# Altium PCB PCB1.PcbDoc
Units mil, origin at the board's own origin, x right, y up, seen from the top; angles counter-clockwise.
Board outline 6000 x 4000 mil, 2 copper layers (Top Layer, Bottom Layer); 43 components, 47 nets, 201 pads, 1 vias.
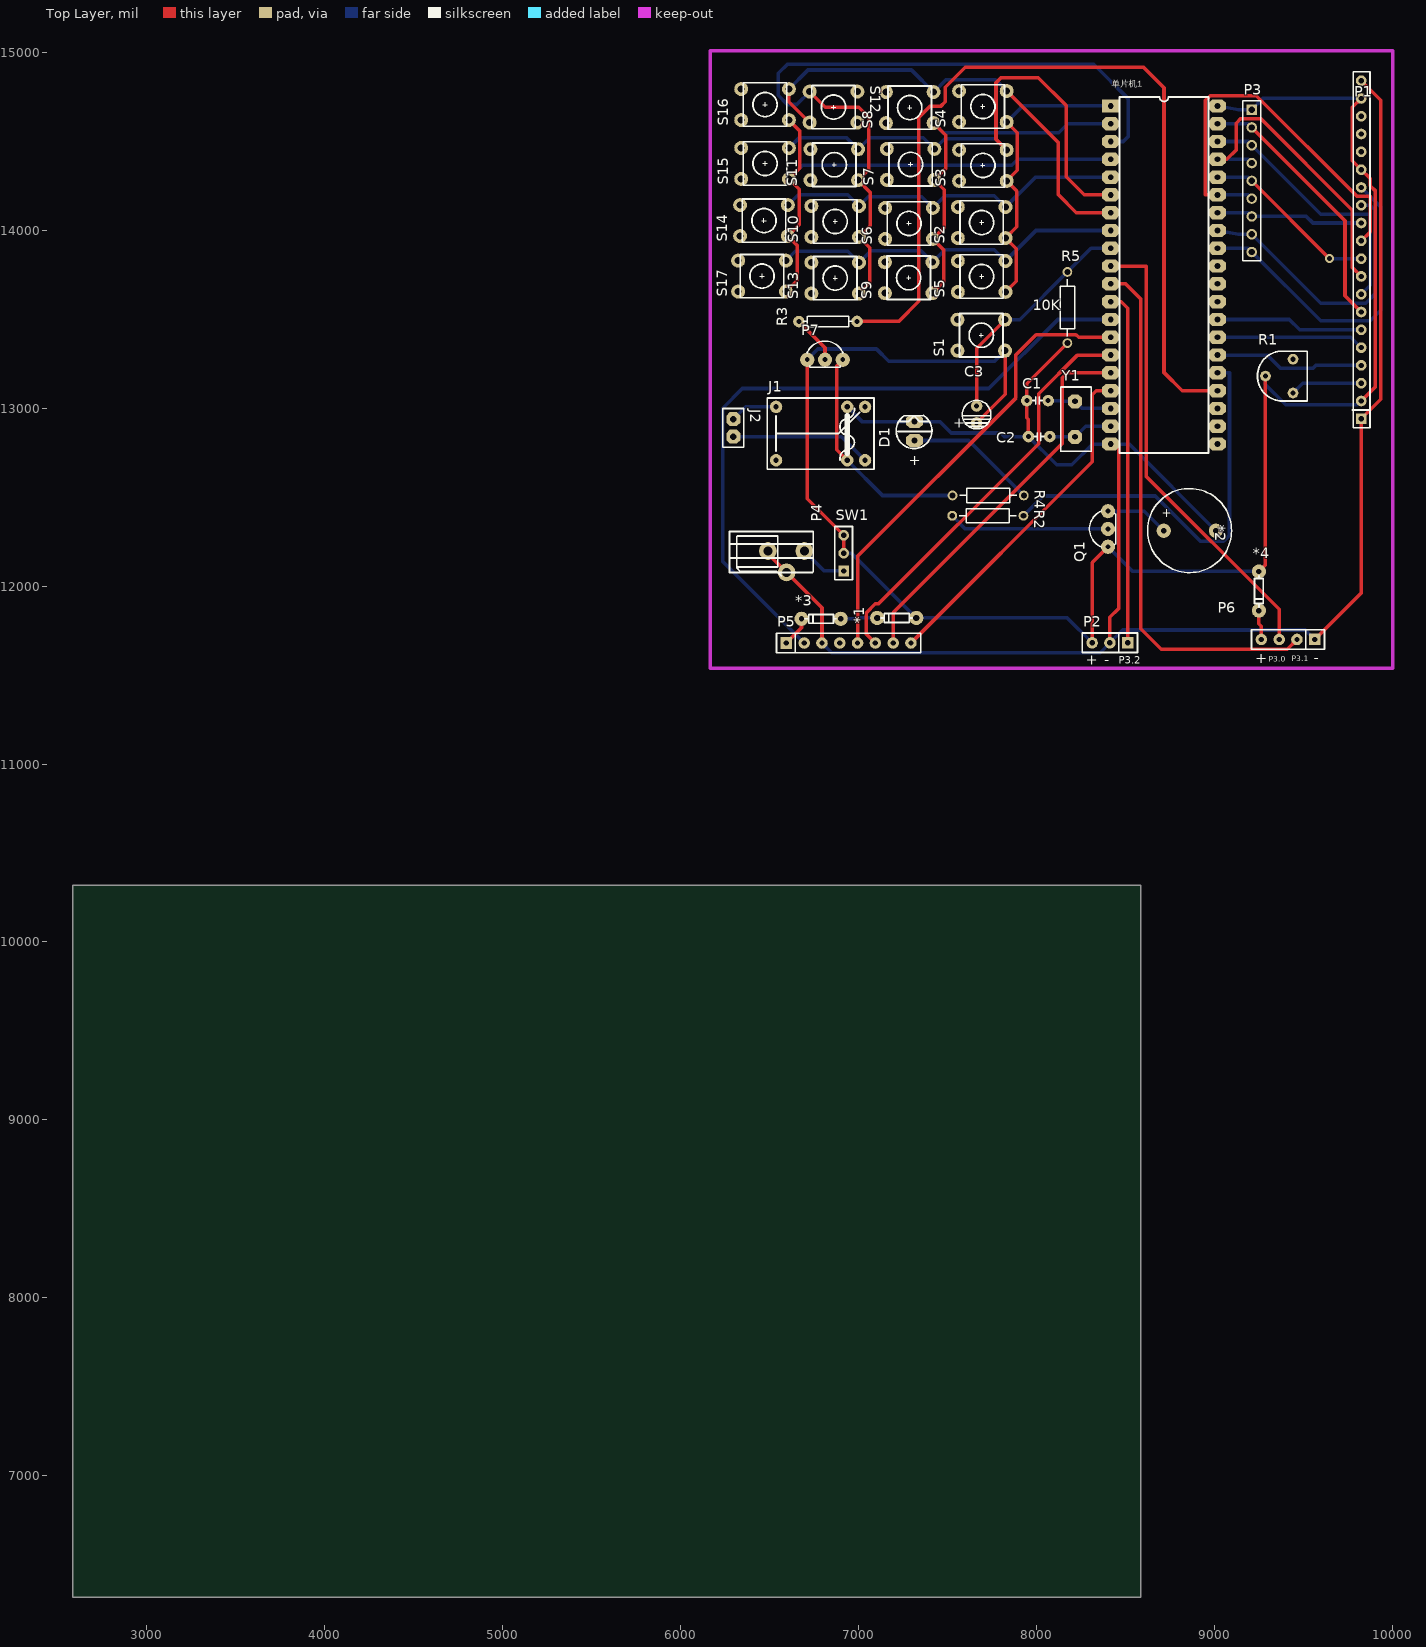
[diagram p0: Top Layer view]
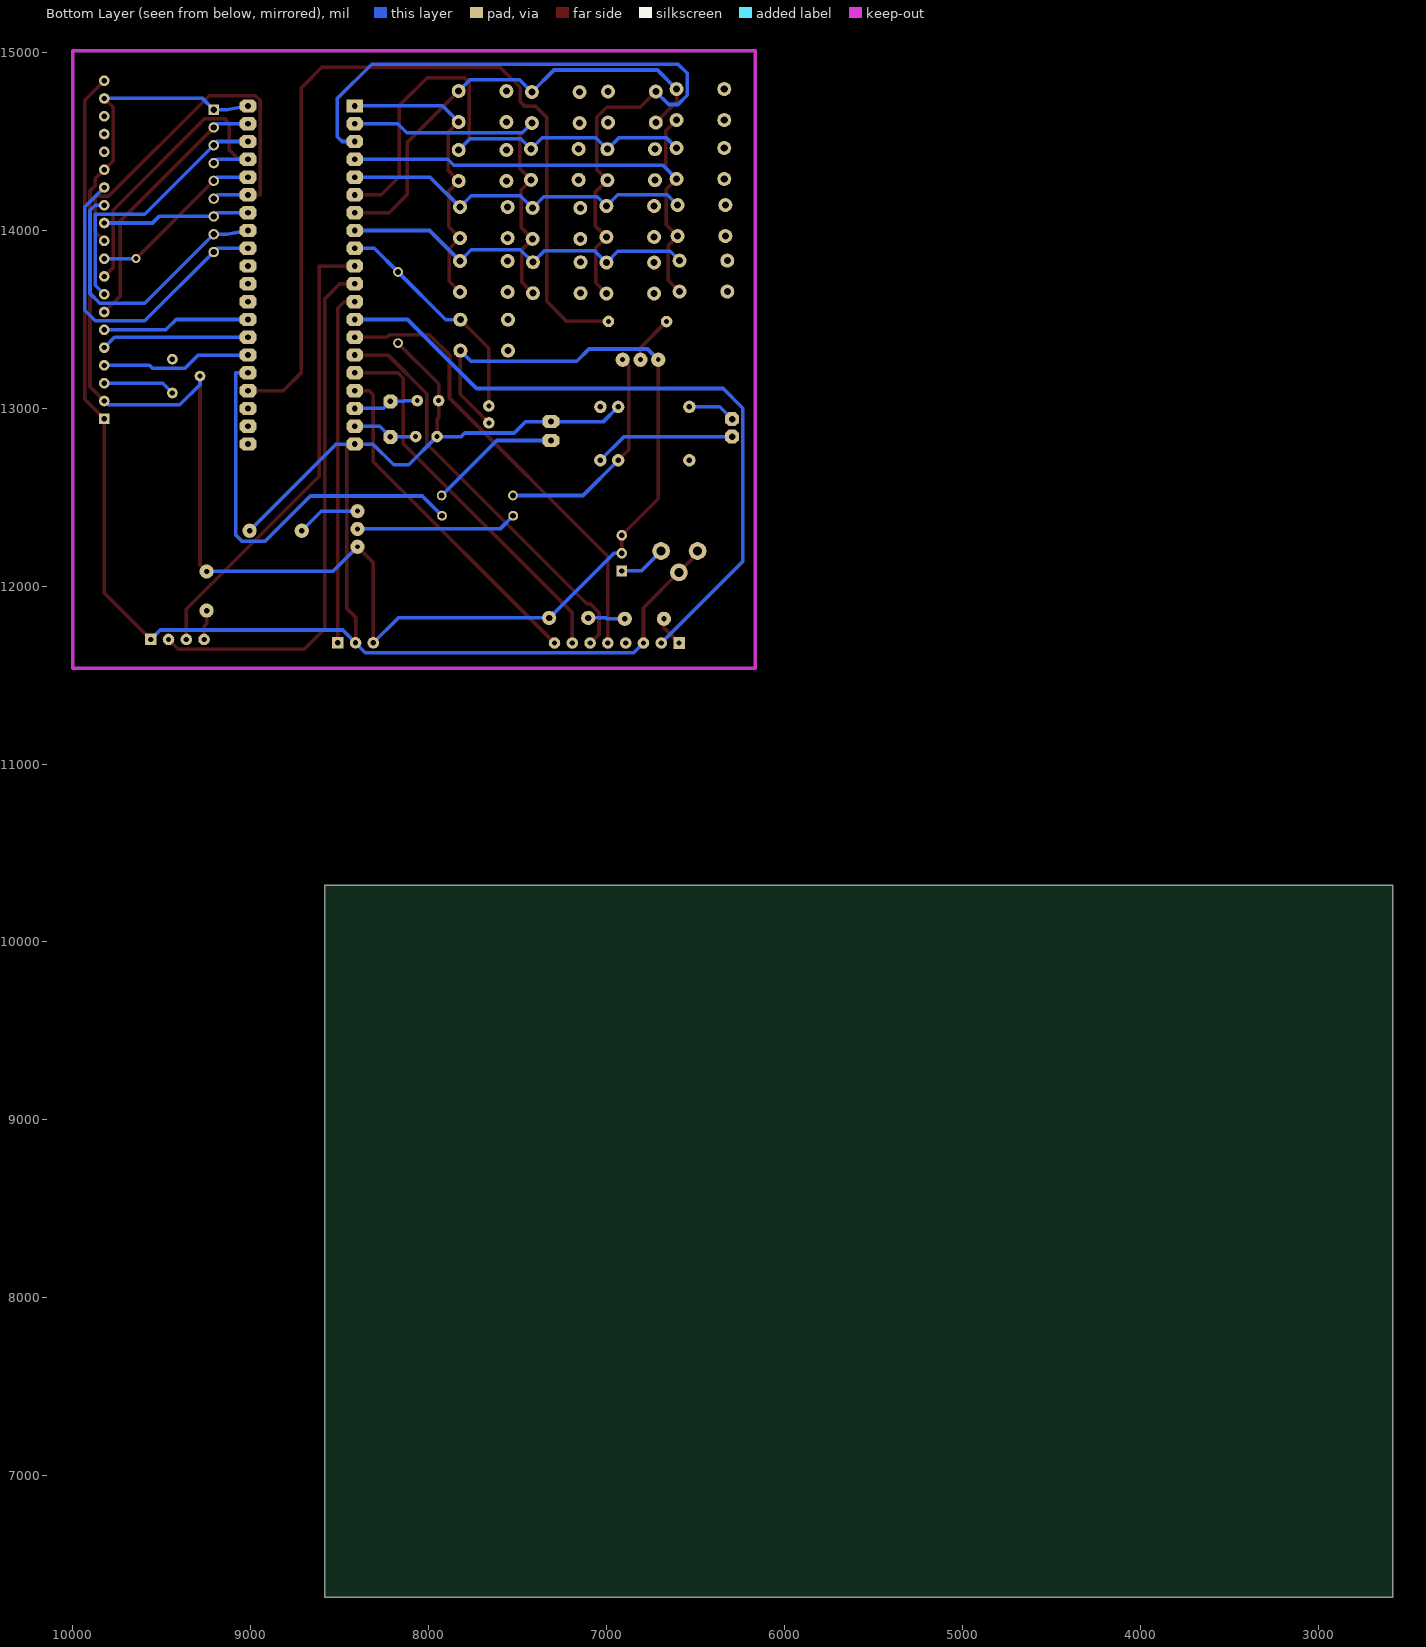
[diagram p1: Bottom Layer view, seen from below]

## Layer stack, top to bottom
Top Layer: signal copper 1.4
Dielectric: dielectric 12.6, FR-4, Dk 4.8
Bottom Layer: signal copper 1.4

## Board outline
2584,6318 8584,6318 8584,10318 2584,10318

## Design rules (kind name [scope] priority, off if disabled: settings)
Clearance [All] p1: gap=10
PolygonConnect [All] p1: connectstyle=Relief reliefconductorwidth=10 reliefentries=4 polygonreliefangle="90 Angle"
RoomDefinition Sheet3 [InComponentClass('Sheet3')] p1: confinementstyle=ConfineIn formatcopy=TRUE lockcomponents=FALSE outline 5866,10857 11370,10857 11370,15409 5866,15409
RoutingVias [All] p1: holewidth=28 width=50 viastyle="Through Hole" minholewidth=28 minwidth=50 maxholewidth=28 maxwidth=50
SilkscreenOverComponentPads [All] p1: minsilkscreentomaskgap=10
SolderMaskExpansion [All] p1: expansion=4
Width [All] p1: maxlimit=20 minlimit=20 preferedwidth=20
27 further rules are at their usual default settings.

## Components (designator, comment, footprint, x,y, rotation, side; value= is the part's Value field where it differs from the comment)
*1 "DIODE_1N4148" 1N4148#1 7321,11821 r180 top
*2 "蜂鸣器" 蜂鸣器 8714,12311 r0 top
*3 "DIODE_1N4148" 1N4148#2 6896,11816 r180 top
*4 "DIODE_1N4148" 1N4148#2 9249,12079 r270 top
C1 "30P" CAP_1 8065,13042 r180 top
C2 "30P" CAP_1 7954,12840 r0 top
C3 "10UF" CAP_2 7663,12917 r90 top
D1 "LED" LED 7314,12818 r90 top
J1 "继电器" JDQ 6771,12832 r90 top
J2 "CON2" SIP2 6296,12938 r270 top
P1 "12864" 12864 9829,13865 r90 top
P2 "PIN3" PIN3 8512,11681 r180 top
P3 "排阻" HDR1X9 9209,14677 r270 top
P4 "POWER_3.5" POWER_3.5 6690,12197 r180 top
P5 "RFID" RFID 6919,11670 r0 top
P6 "PIN4" PIN4 9563,11700 r180 top
P7 "8550" PNP 6716,13272 r0 top
Q1 "8550" PNP 8401,12226 r90 top
R1 "电位器" 电位器 9441,13085 r0 top
R2 "Res2" AXIAL-0.4 7726,12395 r0 top
R3 "RES" RES 6991,13487 r180 top
R4 "Res2" AXIAL-0.4 7728,12509 r0 top
R5 "Res2" AXIAL-0.4 8173,13565 r90 top
S1 "SW-PB" 6X6X? 7689,13410 r90 top
S2 "SW-PB" 6X6X? 7691,14043 r90 top
S3 "SW-PB" 6X6X? 7698,14364 r90 top
S4 "SW-PB" 6X6X? 7698,14695 r90 top
S5 "SW-PB" 6X6X? 7691,13740 r90 top
S6 "SW-PB" 6X6X? 7283,14038 r90 top
S7 "SW-PB" 6X6X? 7292,14370 r90 top
S8 "SW-PB" 6X6X? 7287,14689 r90 top
S9 "SW-PB" 6X6X? 7281,13733 r90 top
S10 "SW-PB" 6X6X? 6868,14049 r90 top
S11 "SW-PB" 6X6X? 6863,14368 r90 top
S12 "SW-PB" 6X6X? 6859,14691 r270 top
S13 "SW-PB" 6X6X? 6868,13731 r90 top
S14 "SW-PB" 6X6X? 6468,14054 r90 top
S15 "SW-PB" 6X6X? 6474,14375 r90 top
S16 "SW-PB" 6X6X? 6474,14706 r90 top
S17 "SW-PB" 6X6X? 6457,13742 r90 top (schematic designator S1)
SW1 "开关_2" 开关_2 6916,12085 r90 top
Y1 "11.0592MHz" 晶振 8216,12838 r90 top
单片机1 "AT89S52" DIP40C 8416,14698 r0 top

## Footprints (in the part's own frame and the unit in brackets; to place one, negate y for a bottom-side part, rotate by r counter-clockwise, add the part's x,y. Pads: shape width x height; smd on the part's side, far side on the other; paste and mask are expansions set on the pad)
1N4148#1 [mil]
  round 80 hole 35: A(-3.11,0) K(216.89,0)
  silkscreen extent 22,-25 197,25
1N4148#2 [mil]
  round 80 hole 30: A(-3.11,0) K(216.89,0)
  silkscreen extent 22,-25 197,25
6X6X? [mm]
  round 2 hole 1: 1(-2.22,-3.407) 2(2.2,-3.407) 3(2.2,3.4) 4(-2.22,3.4)
  silkscreen extent -3.11,-3.1 3.09,3.1
12864 [mil]
  rect 60x60 hole 29.68: 1(-925,5)
  round 60 hole 29.68: 2(-825,5) 3(-725,5) 4(-625,5) 5(-525,5) 6(-425,5) 7(-325,5) 8(-225,5) 9(-125,5) 10(-25,5) 11(75,5) 12(175,5) 13(275,5) 14(375,5) 15(475,5) 16(575,5) 17(675,5) 18(775,5) 19(875,5) 20(975,5)
  silkscreen extent -975,-45 1025,55
AXIAL-0.4 [mm] "Axial Device, Thru-Hole; 2 Leads; 0.4 in Pin Spacing"
  round 1.4 hole 0.85: 1(-5.08,0) 2(5.08,0)
  silkscreen extent -4.06,-1.02 4.06,1.02
CAP_1 [mil]
  round 65 hole 27.56: 1(0,0) 2(120,0)
  silkscreen extent 35,-21 85,21
CAP_2 [mil]
  round 65 hole 27.56: 1(0,0) 2(95,0)
  silkscreen extent -34,-80 126,80
DIP40C [mm]
  rect 2.4x1.9 hole 0.813: 1(0,0)
  oct 2.4x1.9 hole 0.813: 2(0,-2.54) 3(0,-5.08) 4(0,-7.62) 5(0,-10.16) 6(0,-12.7) 7(0,-15.24) 8(0,-17.78) 9(0,-20.32) 10(0,-22.86) 11(0,-25.4) 12(0,-27.94) 13(0,-30.48) 14(0,-33.02) 15(0,-35.56) 16(0,-38.1) 17(0,-40.64) 18(0,-43.18) 19(0,-45.72) 20(0,-48.26) 21(15.24,-48.26) 22(15.24,-45.72) 23(15.24,-43.18) 24(15.24,-40.64) 25(15.24,-38.1) 26(15.24,-35.56) 27(15.24,-33.02) 28(15.24,-30.48) 29(15.24,-27.94) 30(15.24,-25.4) 31(15.24,-22.86) 32(15.24,-20.32) 33(15.24,-17.78) 34(15.24,-15.24) 35(15.24,-12.7) 36(15.24,-10.16) 37(15.24,-7.62) 38(15.24,-5.08) 39(15.24,-2.54) 40(15.24,0)
  silkscreen extent 1.27,-49.53 13.97,1.27
HDR1X9 [mm] "Connector; Header; 9 Position"
  rect 1.5x1.5 hole 0.9: 1(0,0)
  round 1.5 hole 0.9: 2(2.54,0) 3(5.08,0) 4(7.62,0) 5(10.16,0) 6(12.7,0) 7(15.24,0) 8(17.78,0) 9(20.32,0)
  silkscreen extent -1.27,-1.27 21.59,1.27
JDQ [mil]
  round 70 hole 30: 1(-125,-265) 2(175,-265) 3(-125,-165) 4(175,-165) 5(-125,235) 6(175,235)
  silkscreen extent -175,-315 225,285
LED [mm]
  oct 1.9x2.4 hole 0.813: 1(0,0) 2(2.7,0)
  silkscreen extent -1.15,-2.48 3.56,2.62
PIN3 [mil]
  rect 65x65 hole 30: 1(0,0)
  round 65 hole 30: 2(100,0) 3(200,0)
  silkscreen extent -55,-55 255,55
PIN4 [mil]
  rect 65x65 hole 30: 1(0,0)
  round 65 hole 30: 2(100,0) 3(200,0) 4(300,0)
  silkscreen extent -55,-55 355,55
PNP [mil]
  round 80 hole 27.56: 1(-5,0) 2(95,0) 3(195,0)
  silkscreen extent -8,-43 198,104
POWER_3.5 [mil]
  round 100 hole 50: 1(-5,0) 2(95,120) 3(200,0)
  silkscreen extent -55,-110 415,140
RES [mil]
  round 65 hole 27.56: 1(0,0) 2(326.77,0.79)
  silkscreen extent 26,-30 301,30
RFID [mil]
  rect 65x65 hole 30: 1(-325,10)
  round 65 hole 30: 2(-225,10) 3(-125,10) 4(-25,10) 5(75,10) 6(175,10) 7(275,10) 8(375,10)
  silkscreen extent -380,-45 430,65
SIP2 [mm]
  oct 2x2 hole 0.9: 1(0,0) 2(2.5,0)
  silkscreen extent -1.5,-1.5 4,1.5
开关_2 [mil]
  rect 60x60 hole 30: 1(0,0)
  round 60 hole 30: 2(100,0) 2(200,0)
  silkscreen extent -50,-50 250,50
晶振 [mm]
  oct 2x2 hole 0.8: 1(0,0) 2(5.08,0)
  silkscreen extent -2.06,-2.31 7.11,2.03
电位器 [mil]
  round 60 hole 30: 1(0,0) 2(0,190) 3(-155,95)
  silkscreen extent -200,-45 80,235
蜂鸣器 [mil]
  round 80 hole 31.5: 1(0.51,0) 2(293.43,0)
  silkscreen extent -91,-235 382,237

## Part data
P1: library part 1
P3: library part "Header 9", "Header, 9-Pin"
R2 R4 R5: "Resistor"
Y1: library part XTAL

## Via types
v1: diameter 50, hole 28, Top Layer to Bottom Layer, 1 vias

## Nets (pads, with @x,y where several pads share a name; then routed paths per layer and width w, separated by ;. In a path a pad name is that pad's centre, name@x,y a point inside that pad or via, vN(x,y) a via of type N, cw(c..) or ccw(c..) an arc to the next point about the centre after c; other vN are vias at no path point)
GND: *2.2 C1.2 C2.1 D1.2 J1.4 P1.1 P1.20 P2.2 P4.2 P4.3 P5.3 P6.1 R5.1 单片机1.20 | length 11110.2
  Top Layer w20: P4.3 6490,12182 P4.2 6794,11878 P5.3 ; C2.1 7954,12936 7945,12945 C1.2 7945,13137 R5.1 ; P2.2 8412,11825 8461,11874 8461,12798 单片机1.20 ; P6.1 9824,11961 P1.1 9934,13050 9934,14730 P1.20
  Bottom Layer w20: P5.3 6848,11626 8357,11626 P2.2 8484,11753 9510,11753 P6.1 ; J1.4 7018.7,12924.3 D1.2 7456,12924.3 7520.3,12860 7798,12860 7818,12840 C2.1 8113,12681 8198,12681 8315,12798 单片机1.20 8520.43,12798 *2.2
Net*1_K: *1.K *3.A | length 207.1
  Bottom Layer w20: *3.A 6999,11816 7004,11821 *1.K
Net*2_1: *2.1 Q1.3 | length 359.1
  Bottom Layer w20: Q1.3 8604.51,12421 *2.1
Net*3_K: *3.K P5.1 | length 171.3
  Top Layer w20: P5.1 6679.11,11765.11 *3.K
Net*4_K: *4.K P6.4 | length 167.9
  Top Layer w20: *4.K 9249,11788 9263,11774 P6.4
NetC1_1: C1.1 Y1.2 单片机1.18 | length 369.2
  Bottom Layer w20: C1.1 8138,13042 8142,13038 Y1.2 8256,12998 单片机1.18
NetC2_2: C2.2 Y1.1 单片机1.19 | length 367.7
  Bottom Layer w20: C2.2 8144,12840 8146,12838 Y1.1 8276,12898 单片机1.19
NetD1_1: D1.1 R4.2 | length 742
  Bottom Layer w20: D1.1 7619,12818 R4.2
NetJ1_1: J1.1 J2.2 | length 794.9
  Bottom Layer w20: J2.2 6903.43,12839.57 J1.1
NetJ1_3: J1.3 P7.3 R4.1 | length 1277.5
  Top Layer w20: P7.3 6877,13238 6877,12766 J1.3
  Bottom Layer w20: J1.3 7134,12509 R4.1
NetJ1_6: J1.6 J2.1 | length 268.6
  Bottom Layer w20: J2.1 6365,13007 J1.6
NetP1_3: P1.3 R1.1 | length 405.8
  Bottom Layer w20: R1.1 9496,13140 P1.3
NetP4_1: P4.1 SW1.1 | length 267.4
  Bottom Layer w20: P4.1 6807,12085 SW1.1
NetP5_2: P5.2 单片机1.13 | length 3896
  Bottom Layer w20: P5.2 6236,12138 6236,13000 6346,13110 7732,13110 8120,13498 单片机1.13
NetP5_5: P5.5 单片机1.14 | length 2573.7
  Top Layer w20: P5.5 6994,12167 7884,13057 7884,13300 7997,13413 8221,13413 8236,13398 单片机1.14
NetP5_6: P5.6 单片机1.15 | length 2326.5
  Top Layer w20: P5.6 7044,11730 7044,11850 7094,11900 7112,11900 8012,12800 8012,13079.96 8230.04,13298 单片机1.15
NetP5_7: P5.7 单片机1.16 | length 2166.5
  Top Layer w20: P5.7 7194,11851 8143,12800 8143,13168 8173,13198 单片机1.16
NetP5_8: P5.8 单片机1.17 | length 1930.2
  Top Layer w20: P5.8 8312,12698 8312,13075 8335,13098 单片机1.17
NetP7_2: P7.2 R3.2 | length 275
  Top Layer w20: R3.2 6811,13339.44 P7.2
NetQ1_2: Q1.2 R2.1 | length 905.7
  Bottom Layer w20: R2.1 7600,12321 Q1.2
P0.0: P1.7 P3.2 单片机1.39 | length 1493.4
  Top Layer w20: P3.2 9733,14053 9733,13631 P1.7
  Bottom Layer w20: 单片机1.39 9188,14598 P3.2
P0.1: P1.8 P3.3 单片机1.38 | length 1497.7
  Bottom Layer w20: 单片机1.38 9188,14498 P3.3 9596,14090 9874,14090 9874,13690 P1.8
P0.2: P1.9 P3.4 单片机1.37 | length 1748.5
  Top Layer w20: 单片机1.37 9069,14398 9121,14450 9121,14600 9148,14627 9259,14627 9774,14112 9774,13790 P1.9
  Bottom Layer w20: 单片机1.37 9188,14398 P3.4
P0.3: P1.10 P3.5 单片机1.36 | length 997.7
  Top Layer w20: P3.5 v1(9646,13840)
  Bottom Layer w20: 单片机1.36 9188,14298 P3.5 ; v1(9646,13840) P1.10
P0.4: P1.11 P3.6 单片机1.35 | length 2243
  Top Layer w20: 单片机1.35 8948,14198 8948,14729 8975,14756 9234,14756 9800,14190 9874,14190 9874,13990 P1.11
  Bottom Layer w20: 单片机1.35 9188,14198 P3.6
P0.5: P1.12 P3.7 单片机1.34 | length 832
  Bottom Layer w20: 单片机1.34 9188,14098 P3.7 9516,14077 9553,14040 P1.12
P0.6: P1.13 P3.8 单片机1.33 | length 1631.5
  Bottom Layer w20: 单片机1.33 9134,13977 P3.8 9596,13590 9850,13590 9904,13644 9904,14111 9875,14140 P1.13
P0.7: P1.14 P3.9 单片机1.32 | length 1847.4
  Bottom Layer w20: 单片机1.32 9188,13898 P3.9 9596,13490 9874,13490 9934,13550 9934,14130 P1.14
P1.0: S2.1 S3.1 S4.1 S5.1 单片机1.1 | length 1725.5
  Top Layer w20: S5.1 7885,13712.47 7885,13895.76 S2.1 7889,14019.47 7889,14219.76 S3.1 7892,14336.47 7892,14547.76 S4.1
  Bottom Layer w20: S4.1 7922.53,14698 单片机1.1
P1.1: S6.1 S7.1 S8.1 S9.1 单片机1.2 | length 2150
  Top Layer w20: S9.1 7479,13709.47 7479,13888.76 S6.1 7481,14014.47 7481,14227.76 S7.1 7490,14346.47 7490,14532.76 S8.1
  Bottom Layer w20: S8.1 7474.76,14548 8125,14548 8175,14598 单片机1.2
P1.2: S10.1 S11.1 S12.1 S13.1 单片机1.3 | length 4254.7
  Top Layer w20: S12.1 6812.24,14691 7000,14691 7057,14634 7057,14340.47 S11.1 7066,14211.76 7066,14025.47 S10.1 7062,13901.76 7062,13703.47 S13.1
  Bottom Layer w20: S12.1 6652.47,14706 6600,14706 6548,14758 6548,14881 6600,14933 8321,14933 8514,14740 8514,14525 8487,14498 单片机1.3
P1.3: S14.1 S15.1 S16.1 S17.1 单片机1.4 | length 2965.9
  Top Layer w20: S17.1 6655,13718.47 6655,13913.76 S14.1 6666,14030.47 6666,14229.76 S15.1 6668,14347.47 6668,14558.76 S16.1
  Bottom Layer w20: S15.1 6684.53,14364 7860,14364 7894,14398 单片机1.4
P1.4: S2.2 S6.2 S10.2 S14.2 单片机1.5 | length 2036.6
  Bottom Layer w20: S14.2 6660.53,14199 6938.76,14199 S10.2 7054.53,14188 7353.76,14188 S6.2 7485.53,14193 7761.76,14193 S2.2 7993.53,14298 单片机1.5
P1.5: S3.2 S7.2 S11.2 S15.2 单片机1.6 | length 2943.2
  Top Layer w20: S3.2 7772,14510.76 7772,14829 7800,14857 8009,14857 8166,14700 8166,14300 8268,14198 单片机1.6
  Bottom Layer w20: S15.2 6664.53,14518 6933.76,14518 S11.2 7062.53,14520 7362.76,14520 S7.2 7483.53,14514 7768.76,14514 S3.2
P1.6: S4.2 S8.2 S12.2 S16.2 单片机1.7 | length 2650.1
  Top Layer w20: S16.2 6608.14,14721.1 S12.2 ; S4.2 8121,14492.76 8121,14200 8223,14098 单片机1.7
  Bottom Layer w20: S16.2 6715.53,14900 7296.76,14900 S8.2 7490.53,14845 7768.76,14845 S4.2
P1.7: S5.2 S9.2 S13.2 S17.2 单片机1.8 | length 2052.6
  Bottom Layer w20: S17.2 6643.53,13881 6938.76,13881 S13.2 7067.53,13883 7351.76,13883 S9.2 7485.53,13890 7761.76,13890 S5.2 7996.53,13998 单片机1.8
P2.2: 单片机1.23
P2.3: R3.1 单片机1.24 | length 4958.4
  Top Layer w20: R3.1 7225,13487 7338,13600 7338,14633 7400,14695 7460,14695 7487,14722 7487,14802 7600,14915 8601,14915 8716,14800 8716,13200 8818,13098 单片机1.24
P2.4: R2.2 单片机1.25 | length 2304.7
  Bottom Layer w20: R2.2 8037,12506 8666,12506 8921,12251 9050,12251 9084,12285 9084,13198 单片机1.25
P2.5: P1.4 单片机1.26 | length 844.5
  Bottom Layer w20: 单片机1.26 9296,13298 9369,13225 9555,13225 9570,13240 P1.4
P2.6: P1.5 单片机1.27 | length 832
  Bottom Layer w20: 单片机1.27 9766,13398 P1.5
P2.7: P1.6 单片机1.28 | length 832
  Bottom Layer w20: 单片机1.28 9420,13498 9478,13440 P1.6
P3.0: P6.3 单片机1.10 | length 2606.2
  Top Layer w20: 单片机1.10 8614,13798 8615,13797 8615,12617 9363,11869 P6.3
P3.1: P6.2 单片机1.11 | length 3005.6
  Top Layer w20: 单片机1.11 8500,13698 8585,13613 8585,11760 8700,11645 9408,11645 P6.2
P3.2: P2.1 单片机1.12 | length 1991.3
  Top Layer w20: 单片机1.12 8475,13598 8512,13561 P2.1
RST: C3.2 R5.2 S1.2 单片机1.9 | length 1310.1
  Top Layer w20: C3.2 7663,13336.47 S1.2
  Bottom Layer w20: S1.2 7904.61,13496.61 R5.2 8306,13898 单片机1.9
VCC: *1.A *4.A C3.1 P1.2 P1.15 P1.19 P2.3 P3.1 P7.1 Q1.1 R1.3 S1.1 SW1.2 单片机1.40 | length 10320.5
  Top Layer w20: P7.1 6711,12490 6916,12285 SW1.2@6916,12185 ; C3.1 7823.14,13077.14 S1.1 ; P2.3 8312,12132 Q1.1 ; *4.A 9286,12119.11 R1.3 ; P1.2 9904,13120 9904,14220 9874,14250 9874,14290 P1.15 9774,14390 9774,14690 P1.19
  Bottom Layer w20: P7.1 6771,13332 7100,13332 7169,13263 7763.53,13263 S1.1 ; SW1.2@6916,12185 6960.11,12185 *1.A 8172,11821 P2.3 ; Q1.1 8539.89,12082.11 *4.A ; 单片机1.40 9134,14677 P3.1 9272,14740 P1.19 ; R1.3 9286,13132 9400,13018 9802,13018 P1.2
pads on no net: J1.2 J1.5 P1.16 P1.17 P1.18 P5.4 R1.2 S1.3 S1.4 S2.3 S2.4 S3.3 S3.4 S4.3 S4.4 S5.3 S5.4 S6.3 S6.4 S7.3 S7.4 S8.3 S8.4 S9.3 S9.4 S10.3 S10.4 S11.3 S11.4 S12.3 S12.4 S13.3 S13.4 S14.3 S14.4 S15.3 S15.4 S16.3 S16.4 S17.3 S17.4 单片机1.21 单片机1.22 单片机1.29 单片机1.30 单片机1.31

## Keep-outs
Keep-Out Layer:
  lines w20: 6166,11538 10001,11538 10001,15008 6166,15008 6166,11538

## Silkscreen, mask and mechanical layers (free items; w line width, h text height)
Top Overlay:
  text "10K" at 7979,13551 h60
  text "+" at 7532,12889 h60
  text "+" at 7282,12680 h60
  text "P3.1" at 9433,11577 h30
  text "P3.0" at 9305,11576 h30
  text "-" at 9557,11568 h60
  text "+" at 9228,11566 h60
  text "P3.2" at 8463,11563 h40
  text "+" at 8275,11557 h60
  text "-" at 8381,11557 h60

## Text inside footprints (layer, text, board x,y; h text height)
*2: Top Overlay "+" at 8704,12386 h50